# Altium PCB Temperature_Flex_REV1.PcbDoc
Units mm, origin at the board's own origin, x right, y up, seen from the top; angles counter-clockwise.
Board outline 130.56 x 10.92 mm, 2 copper layers (Top Layer, Bottom Layer), stack 0.518 mm thick; 2 components, 3 nets, 13 pads, 0 vias.
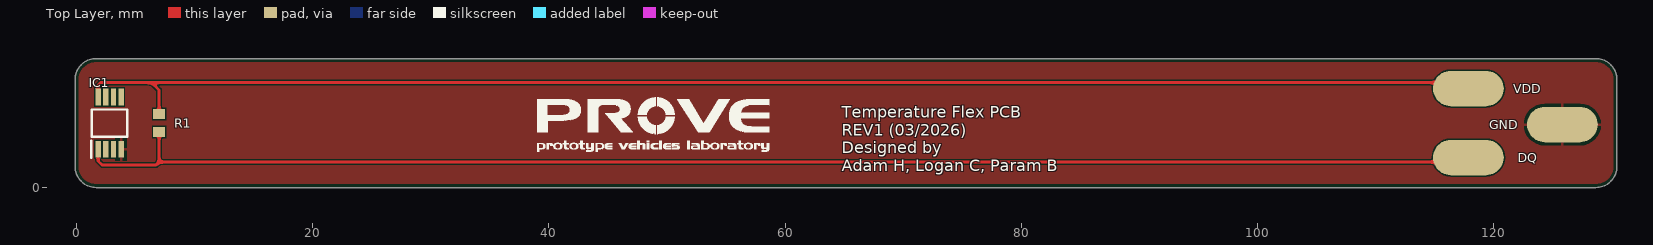
[diagram p0: Top Layer view]
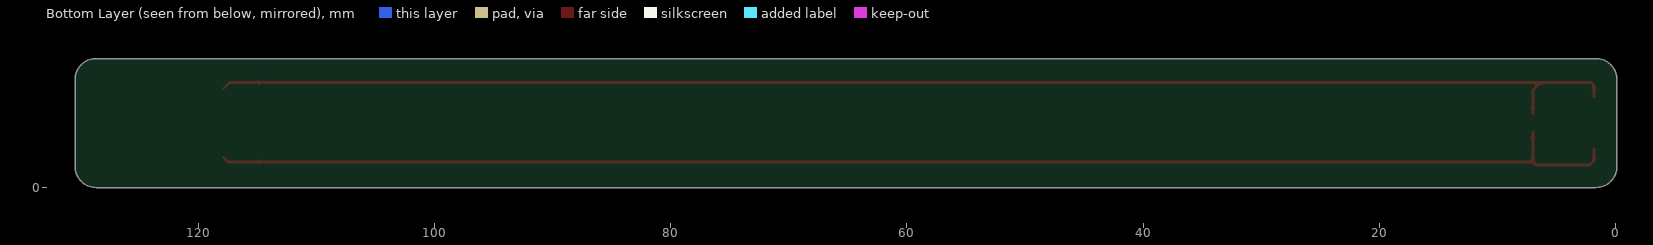
[diagram p1: Bottom Layer view, seen from below]

## Layer stack, top to bottom
Top Stiffener: core 0.1016, Core-009, Dk 4.5
Top Coverlay: solder mask 0.012, FC-001, Dk 4
Top Layer: signal copper 0.0356
Adhesive 1: prepreg 0.0711, PP-006, Dk 4.1
Polyimide: core 0.1016, Core-009, Dk 4.5
Adhesive 2: prepreg 0.0711, PP-006, Dk 4.1
Bottom Layer: signal copper 0.0356
Bottom Coverlay: solder mask 0.012, FC-001, Dk 4
Stiffener: core 0.1016, Core-009, Dk 4.5

## Board outline
-0.127,1.778 -0.127,9.144 cw(c1.651,9.144) 1.651,10.922 128.651,10.922 cw(c128.651,9.144) 130.429,9.144 130.429,1.778 cw(c128.651,1.778) 128.651,0 1.651,0 cw(c1.651,1.778)

## Design rules (kind name [scope] priority, off if disabled: settings)
BoardOutlineClearance [All] p1: gap=0.3 ignorepadtopadclearanceinfootprint=FALSE
Clearance [All] p1: gap=0.102 ignorepadtopadclearanceinfootprint=FALSE
HoleSize [All] p1: absolutevalues=TRUE maxlimit=5 minlimit=0.15 maxpercent=80.000 minpercent=20.000
HoleToHoleClearance [All] p1: gap=0.2 allowstackedmicrovias=TRUE
MinimumAnnularRing [All] p1: minimumring=0.152
PolygonConnect [All] p1: connectstyle=Relief reliefconductorwidth=0.254 reliefentries=4 polygonreliefangle="90 Angle" airgapwidth=0.254
RoutingVias [All] p1: holewidth=0.711 width=1.27 viastyle="Through Hole" minholewidth=0.3 minwidth=0.55 maxholewidth=0.711 maxwidth=1.27
SolderMaskExpansion [All] p1: expansion=0.1 istentingtop=FALSE
SupplyNets "Schematic Supply Nets" [InNet('GND')] p1: voltage=0.000
Width [All] p1: maxlimit=1.016 minlimit=0.102 preferedwidth=0.114
28 further rules are at their usual default settings.

## Components (designator, comment, footprint, x,y, rotation, side; value= is the part's Value field where it differs from the comment)
IC1 "DS18B20U+" SOP65P490X110-8N 2.794,5.461 r90 top
R1 "4.7k" RESC1608X50N 6.985,5.461 r90 top

## Footprints (in the part's own frame and the unit in brackets; to place one, negate y for a bottom-side part, rotate by r counter-clockwise, add the part's x,y. Pads: shape width x height; smd on the part's side, far side on the other; paste and mask are expansions set on the pad)
RESC1608X50N [mm]
  rect 0.85x1 smd: 1(-0.75,0) 2(0.75,0)
  body extent -0.77,-0.43 0.78,0.42, height 0.45
SOP65P490X110-8N [mm]
  rect 1.425x0.45 smd: 1(-2.212,0.975) 2(-2.212,0.325) 3(-2.212,-0.325) 4(-2.212,-0.975) 5(2.212,-0.975) 6(2.212,-0.325) 7(2.212,0.325) 8(2.212,0.975)
  silkscreen extent -2.93,-1.5 1.15,1.55, body extent -2.51,-1.5 2.51,1.6, height 1.1

## Part data
IC1: "Integrated Circuit", Manufacturer_Name="Analog Devices", Mouser Part Number=700-DS18B20U, Arrow Part Number=DS18B20U+, Arrow Price/Stock=https://www.arrow.com/en/products/ds18b20u/analog-devices?utm_currency=USD&region=nac, Datasheet Link=https://datasheets.maximintegrated.com/en/ds/DS18B20.pdf, Height=1.1mm, Manufacturer_Part_Number=DS18B20U+, Mouser Price/Stock=https://www.mouser.co.uk/ProductDetail/Analog-Devices-Maxim-Integrated/DS18B20U%2b?qs=7H2Jq%252ByxpJLxAEcPXZtrFQ%3D%3D
R1: library part CRCW06034K70FKEAHP, "Resistor", Manufacturer_Name=Vishay, Mouser Part Number=71-CRCW06034K70FKEAH, Arrow Part Number=CRCW06034K70FKEAHP, Arrow Price/Stock=https://www.arrow.com/en/products/crcw06034k70fkeahp/vishay?utm_currency=USD&region=nac, Datasheet Link=http://www.farnell.com/datasheets/1885357.pdf, Height=0.5mm, Manufacturer_Part_Number=CRCW06034K70FKEAHP, Mouser Price/Stock=https://www.mouser.co.uk/ProductDetail/Vishay-Dale/CRCW06034K70FKEAHP?qs=k2%2FDWSARqgF9tclCHvhGkQ%3D%3D

## Free pads (board coordinates)
  oval 6x3 smd: 1(117.856,8.382) 3(125.817,5.328) 4(117.856,2.54)

## Nets (pads, with @x,y where several pads share a name; then routed paths per layer and width w, separated by ;. In a path a pad name is that pad's centre, name@x,y a point inside that pad or via, vN(x,y) a via of type N, cw(c..) or ccw(c..) an arc to the next point about the centre after c; other vN are vias at no path point)
DQ: IC1.1 pad.4 R1.1 | length 120
  Top Layer w0.254: IC1.1 1.819,2.245 2.159,1.905 6.731,1.905 6.985,2.159 ; R1.1 6.985,2.159 ; pad.4 117.475,2.159 75.735,2.159 6.985,2.159
GND: IC1.4 pad.3
VDD: IC1.8 pad.1 R1.2 | length 120.3
  Top Layer w0.254: IC1.8 1.819,8.677 2.032,8.89 6.35,8.89 ; R1.2 6.985,8.255 6.35,8.89 ; pad.1 117.348,8.89 6.35,8.89
pads on no net: IC1.2 IC1.3 IC1.5 IC1.6 IC1.7

## Polygon pours and split planes (outlines as drawn)
no net on Bottom Stiffener "NONET_L-01_P-001" (none): -0.127,1.778 -0.127,9.144 cw(c1.651,9.144) 1.651,10.922 128.651,10.922 cw(c128.651,9.144) 130.429,9.144 130.429,1.778 cw(c128.651,1.778) 128.651,0 1.651,0 cw(c1.651,1.778)
no net on Layer0 "Default Coverlay 1 Top" (split plane): -0.127,0 130.429,0 130.429,10.922 -0.127,10.922
GND on Top Layer "GND_L01_P000" (solid, pour order 0): -0.127,10.922 -0.127,0 130.429,0 130.429,10.922
no net on Layer0 "Default Coverlay 1 Bottom" (split plane): -0.127,0 130.429,0 130.429,10.922 -0.127,10.922
no net on Top Stiffener "NONET_L-01_P-001" (none): -0.127,1.778 -0.127,9.144 cw(c1.651,9.144) 1.651,10.922 128.651,10.922 cw(c128.651,9.144) 130.429,9.144 130.429,1.778 cw(c128.651,1.778) 128.651,0 1.651,0 cw(c1.651,1.778)

## Silkscreen, mask and mechanical layers (free items; w line width, h text height)
Top Overlay:
  drawing of 36 lines, arcs and shapes, not listed
  text "VDD" at 121.666,8.001 h0.76
  text "GND" at 119.634,4.953 h0.76
  text "DQ" at 122.047,2.159 h0.76
  text "Temperature Flex PCB / REV1 (03/2026) / Designed by / Adam H, Logan C, Param B" at 64.77,1.397 h1
Mechanical 1:
  lines w0.254: -0.127,1.778 ccw(c1.651,1.778) 1.651,0 128.651,0 ccw(c128.651,1.778) 130.429,1.778 130.429,9.144 ccw(c128.651,9.144) 128.651,10.922 3.048,10.922 1.651,10.922 ccw(c1.651,9.144) -0.127,9.144 -0.127,1.778